# Altium PCB PCB1.PcbDoc
Units mil, origin at the board's own origin, x right, y up, seen from the top; angles counter-clockwise.
Board outline 2355.12 x 1460.12 mil, 2 copper layers (Top Layer, Bottom Layer); 44 components, 36 nets, 217 pads, 180 vias.
Unrouted connection lines stored in the file: 1.
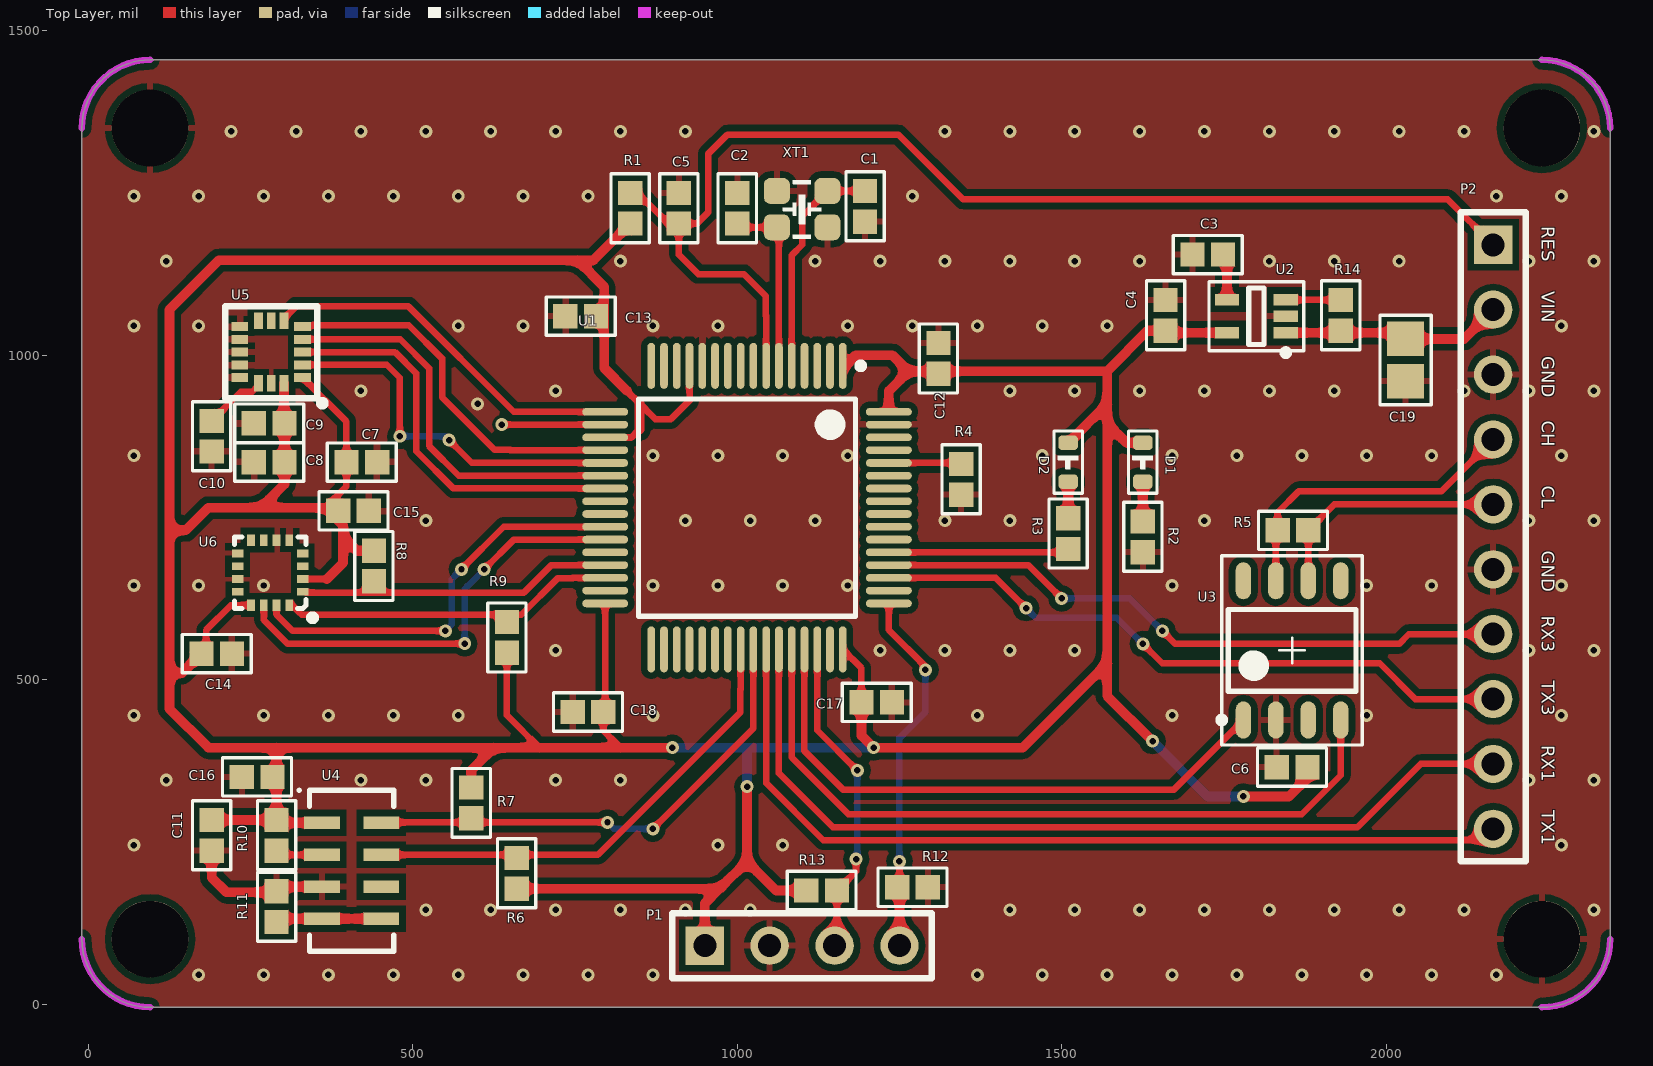
[diagram p0: Top Layer view]
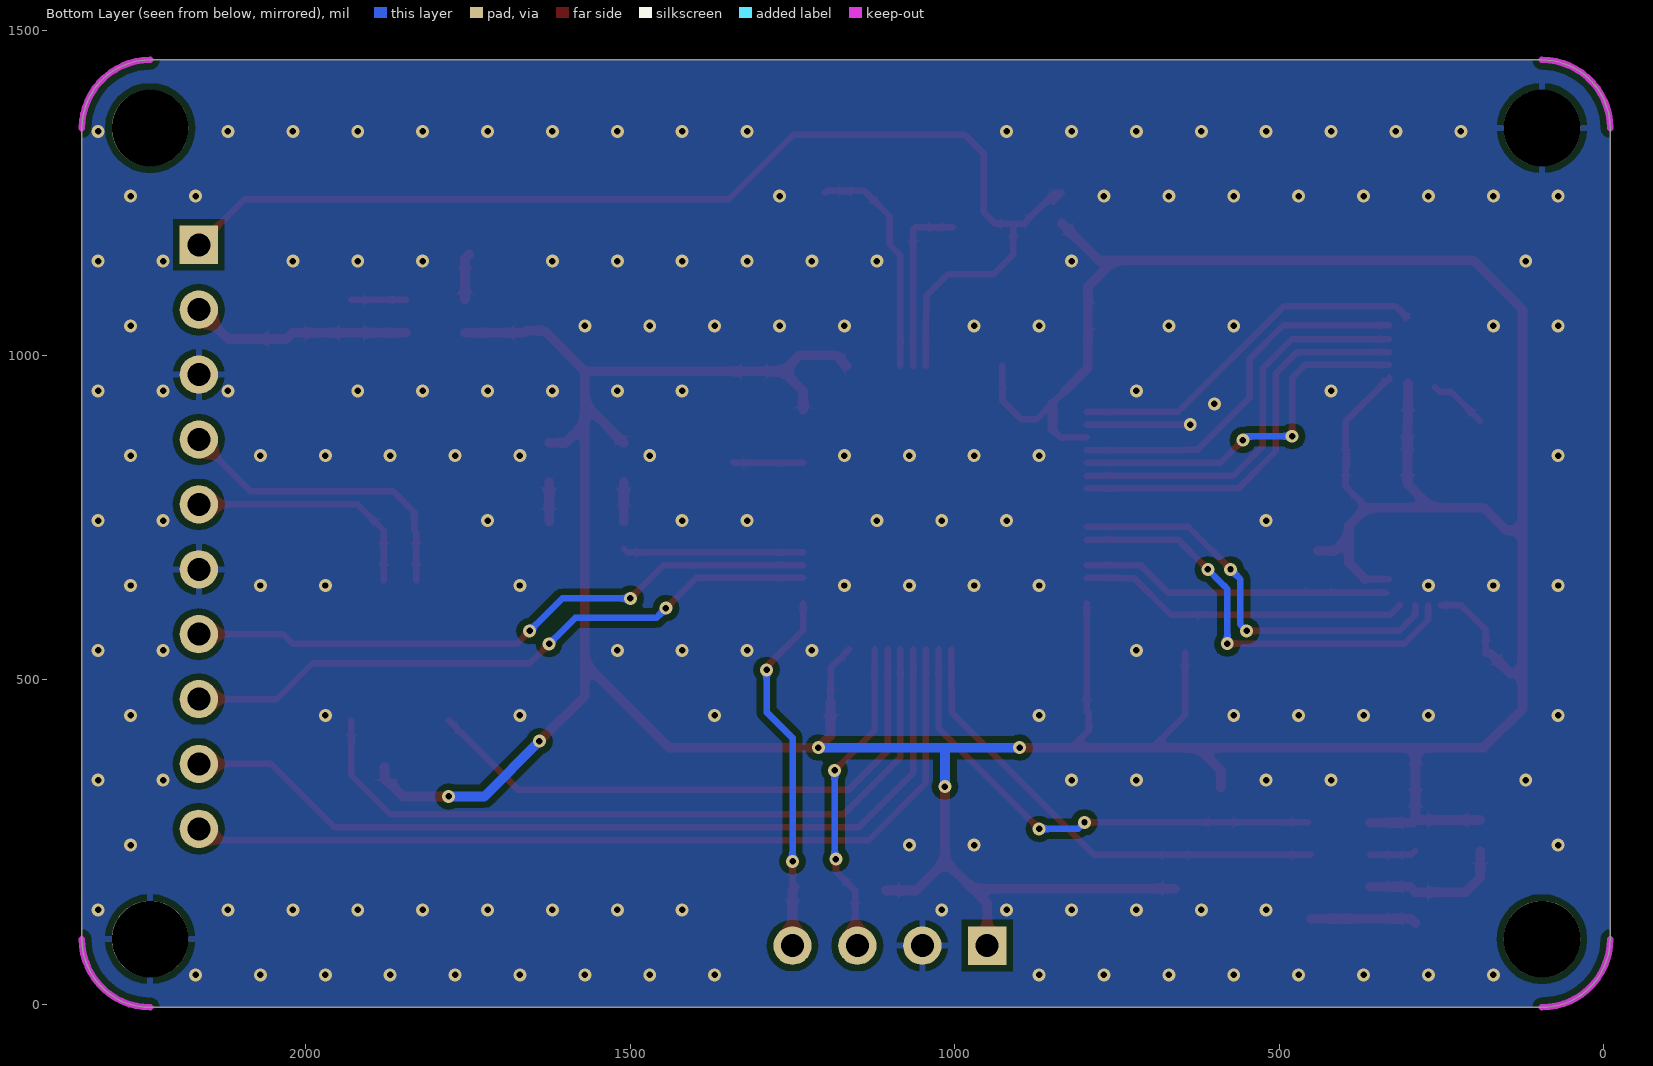
[diagram p1: Bottom Layer view, seen from below]

## Layer stack, top to bottom
Top Solder: solder mask 0.4, Solder Resist, Dk 3.5
Top Layer: signal copper 1.4
Dielectric 1: dielectric 12.6, FR-4, Dk 4.8
Bottom Layer: signal copper 1.4
Bottom Solder: solder mask 0.4, Solder Resist, Dk 3.5

## Board outline
-10,100 ccw(c95,100) 95,-5 2240,-5 2240,-5.12 ccw(c2240,100) 2345.12,100 2345,1350 ccw(c2240,1350) 2240,1455 95,1455 ccw(c95,1350) -10,1350

## Design rules (kind name [scope] priority, off if disabled: settings)
Clearance [All] p1: gap=10 ignorepadtopadclearanceinfootprint=FALSE except(0: Arc-Hole Track-Hole SMDPad-Hole THPad-Hole Via-Hole Fill-Hole Poly-Hole Region-Hole Text-Hole)
PolygonConnect [All] p1: connectstyle=Relief reliefconductorwidth=10 reliefentries=4 polygonreliefangle="90 Angle" airgapwidth=10
RoomDefinition Sheet1 [InComponentClass('Sheet1')] p1: confinementstyle=ConfineIn formatcopy=TRUE lockcomponents=FALSE outline -2730,-2655 -730,-2655 -730,-1655 -2730,-1655
RoutingVias [All] p1: holewidth=10 width=20 viastyle="Through Hole" minholewidth=10 minwidth=20 maxholewidth=20 maxwidth=35
SolderMaskExpansion [All] p1: expansion=4
Width [All] p1: maxlimit=15 minlimit=10 preferedwidth=10 minimp=50.000000 maximp=50.000000 favimp=50.000000
30 further rules are at their usual default settings.

## Components (designator, comment, footprint, x,y, rotation, side; value= is the part's Value field where it differs from the comment)
C1 "Cap_0603" CAP_0603 1197,1229.38 r90 top value=10p
C2 "Cap_0603" CAP_0603 1000,1226.38 r270 top value=10p
C3 "Cap_0603" CAP_0603 1725,1155 r0 top value=0.01u
C4 "Cap_0603" CAP_0603 1660,1061.38 r270 top value=1u
C5 "Cap_0603" CAP_0603 910,1226.38 r270 top value=0.1u
C6 "Cap_0603" CAP_0603 1855,365 r180 top value=100n
C7 "Cap_0603" CAP_0603 421.38,835 r180 top value=10n
C8 "Cap_0603" CAP_0603 278.62,835 r0 top value=0.1u
C9 "Cap_0603" CAP_0603 278.62,895 r0 top value=2.2u
C10 "Cap_0603" CAP_0603 190,875 r90 top value=0.1u
C11 "Cap_0603" CAP_0603 190,260 r90 top value=100n
C12 "Cap_0603" CAP_0603 1310,995 r270 top value=100n
C13 "Cap_0603" CAP_0603 758.62,1060 r0 top value=100n
C14 "Cap_0603" CAP_0603 197.82,540 r180 top value=100n
C15 "Cap_0603" CAP_0603 408.62,760 r180 top value=100n
C16 "Cap_0603" CAP_0603 260,350 r0 top value=100n
C17 "Cap_0603" CAP_0603 1215,465 r180 top value=100n
C18 "Cap_0603" CAP_0603 770,450 r0 top value=100n
C19 "Cap_0805" CAP_0805 2030,992.52 r90 top value=10u
D1 "LED_0603" LED_0603 1625,835 r270 top
D2 "LED_0603" LED_0603 1510,835 r270 top
P1 "Header_1*4" HDR1*4 950,90 r0 top
P2 "Header_1*10" HDR1*10 2165,1170 r270 top
R1 "Res_0603" RES_0603 835,1226.38 r90 top value=10k
R2 "Res_0603" RES_0603 1625,720 r270 top value=10k
R3 "Res_0603" RES_0603 1510,725 r270 top value=10k
R4 "Res_0603" RES_0603 1345,808.62 r270 top value=10k
R5 "Res_0603" RES_0603 1856.38,730 r0 top value=120
R6 "Res_0603" RES_0603 660,201.38 r270 top value=10k
R7 "Res_0603" RES_0603 590,310 r90 top value=10k
R8 "Res_0603" RES_0603 440,675 r90 top value=10k
R9 "Res_0603" RES_0603 645,565 r270 top value=10k
R10 "Res_0603" RES_0603 290,260 r90 top value=10k
R11 "Res_0603" RES_0603 290,150 r90 top value=10k
R12 "Res_0603" RES_0603 1270,180 r180 top value=10k
R13 "Res_0603" RES_0603 1130,175 r0 top value=10k
R14 "Res_0603" RES_0603 1930,1061.38 r90 top value=10k
U1 "STM32F405RGT6" STM-LQFP64_N 1015,765 r270 top
U2 "SGM2019" SGM2019 1800,1060 r180 top
U3 "SN65HVD230D" SN65HVD230 1855,545 r90 top
U4 "MS5611" MS5611 405.67,205.39 r0 top
U5 "ICM20602" ICM20602 281.77,1004.68 r180 top
U6 "IST8310" IST8310 330.35,635.28 r180 top
XT1 "XTAL_2520_4P" XT_2520_4 1100,1225 r0 top value=8MHz

## Footprints (in the part's own frame and the unit in brackets; to place one, negate y for a bottom-side part, rotate by r counter-clockwise, add the part's x,y. Pads: shape width x height; smd on the part's side, far side on the other; paste and mask are expansions set on the pad)
CAP_0603 [mm] "Chip Resistor, 2-Leads, Body 1.60x0.80mm, IPC Medium Density"
  rect 0.95x0.95 smd: 1(-0.6,0) 2(0.6,0)
  silkscreen extent -1.35,-0.75 1.35,0.75, body extent -0.87,-0.48 0.88,0.48, height 0.8
CAP_0805 [mm] "Chip Capacitor, 2-Leads, Body 2.01x1.25mm, IPC Medium Density"
  rect 1.35x1.45 smd: 1(-0.825,0) 2(0.825,0)
  silkscreen extent -1.75,-1 1.75,1, body extent -1.1,-0.72 1.11,0.72, height 0.8
HDR1*4 [mm]
  rect 1.5x1.5 hole 0.9: 1(0,0)
  round 1.5 hole 0.9: 2(2.54,0) 3(5.08,0) 4(7.62,0)
  silkscreen extent -1.27,-1.27 8.89,1.27
HDR1*10 [mm]
  rect 1.5x1.5 hole 0.9: 1(0,0)
  round 1.5 hole 0.9: 2(2.54,0) 3(5.08,0) 4(7.62,0) 5(10.16,0) 6(12.7,0) 7(15.24,0) 8(17.78,0) 9(20.32,0) 10(22.86,0)
  silkscreen extent -1.27,-1.27 24.13,1.27
ICM20602 [mm]
  rect 0.65x0.35 smd: 1(-1.225,1) 2(-1.225,0.5) 3(-1.225,0) 4(-1.225,-0.5) 5(-1.225,-1) 9(1.225,-1) 10(1.225,-0.5) 11(1.225,0) 12(1.225,0.5) 13(1.225,1)
  rect 0.35x0.65 smd: 6(-0.5,-1.225) 7(0,-1.225) 8(0.5,-1.225) 14(0.5,1.225) 15(0,1.225) 16(-0.5,1.225)
  rect 0x0 smd: 17(0,0) 18(0,0) 19(0,0) 20(0,0) 21(0,0) 22(0,0) 23(0,0) 24(0,0)
  silkscreen extent -2.12,-1.8 1.8,2.12, body extent -1.55,-1.55 1.55,1.55, height 0.75
IST8310 [mm]
  rect 0.45x0.3 smd: 1(0,0) 2(0,-0.5) 3(0,-1) 4(0,-1.5) 9(2.55,-1.5) 10(2.55,-1) 11(2.55,-0.5) 12(2.55,0)
  rect 0.3x0.45 smd: 5(0.525,-2.025) 6(1.025,-2.025) 7(1.525,-2.025) 8(2.025,-2.025) 13(2.025,0.525) 14(1.525,0.525) 15(1.025,0.525) 16(0.525,0.525)
  silkscreen extent -0.51,-2.15 2.67,1.14
LED_0603 [mil]
  rrect50% 22x30 smd: 1(-30,0) 2(30,0)
  silkscreen extent -48,-22 48,22, body extent -32,-16 32,16, height 24
MS5611 [mm] "SON, 8-Leads, Body 6.00x3.00mm, Pitch 1.25mm, IPC Medium Density"
  rect 1.4x0.5 smd: 1(-1.16,1.875) 2(-1.16,0.625) 3(-1.16,-0.625) 4(-1.16,-1.875) 5(1.16,-1.875) 6(1.16,-0.625) 7(1.16,0.625) 8(1.16,1.875)
  silkscreen extent -2.1,-3.15 1.65,3.2, body extent -1.5,-3 1.5,3, height 1
RES_0603 [mm] "Chip Resistor, 2-Leads, Body 1.60x0.80mm, IPC Medium Density"
  rect 0.95x0.95 smd: 1(-0.6,0) 2(0.6,0)
  silkscreen extent -1.35,-0.75 1.35,0.75, body extent -0.87,-0.48 0.88,0.48, height 0.8
SGM2019 [mm] "SOT23, 5-Leads, Body 2.10x2.30mm, Pitch 0.65mm, IPC Medium Density"
  rect 0.95x0.45 smd: 1(-1.15,0.65) 2(-1.15,0) 3(-1.15,-0.65) 4(1.15,-0.65) 5(1.15,0.65)
  silkscreen extent -1.85,-1.35 1.85,1.55, body extent -0.67,-1.1 0.67,1.1, height 1.1
SN65HVD230 [mm] "SOP, 8-Leads, Body 4.90x3.90mm, Pitch 1.27mm, IPC Medium Density"
  oval 1.45x0.6 smd: 1(-2.725,1.905) 2(-2.725,0.635) 3(-2.725,-0.635) 4(-2.725,-1.905) 5(2.725,-1.905) 6(2.725,-0.635) 7(2.725,0.635) 8(2.725,1.905)
  silkscreen extent -3.7,-2.75 3.7,2.88, body extent -2,-2.5 2,2.5, height 1.75
STM-LQFP64_N [mm] "Thin QFP, 64-Leads, Body 10x10mm, Pitch 0.5mm, IPC Medium Density"
  oval 1.8x0.3 smd: 1(-5.55,3.75) 2(-5.55,3.25) 3(-5.55,2.75) 4(-5.55,2.25) 5(-5.55,1.75) 6(-5.55,1.25) 7(-5.55,0.75) 8(-5.55,0.25) 9(-5.55,-0.25) 10(-5.55,-0.75) 11(-5.55,-1.25) 12(-5.55,-1.75) 13(-5.55,-2.25) 14(-5.55,-2.75) 15(-5.55,-3.25) 16(-5.55,-3.75) 33(5.55,-3.75) 34(5.55,-3.25) 35(5.55,-2.75) 36(5.55,-2.25) 37(5.55,-1.75) 38(5.55,-1.25) 39(5.55,-0.75) 40(5.55,-0.25) 41(5.55,0.25) 42(5.55,0.75) 43(5.55,1.25) 44(5.55,1.75) 45(5.55,2.25) 46(5.55,2.75) 47(5.55,3.25) 48(5.55,3.75)
  oval 0.3x1.8 smd: 17(-3.75,-5.55) 18(-3.25,-5.55) 19(-2.75,-5.55) 20(-2.25,-5.55) 21(-1.75,-5.55) 22(-1.25,-5.55) 23(-0.75,-5.55) 24(-0.25,-5.55) 25(0.25,-5.55) 26(0.75,-5.55) 27(1.25,-5.55) 28(1.75,-5.55) 29(2.25,-5.55) 30(2.75,-5.55) 31(3.25,-5.55) 32(3.75,-5.55) 49(3.75,5.55) 50(3.25,5.55) 51(2.75,5.55) 52(2.25,5.55) 53(1.75,5.55) 54(1.25,5.55) 55(0.75,5.55) 56(0.25,5.55) 57(-0.25,5.55) 58(-0.75,5.55) 59(-1.25,5.55) 60(-1.75,5.55) 61(-2.25,5.55) 62(-2.75,5.55) 63(-3.25,5.55) 64(-3.75,5.55)
  silkscreen extent -5.67,-4.25 4.25,4.58, body extent -5,-5 5,5, height 1.6
XT_2520_4 [mil]
  rrect50% 40x40 smd: 1(39,28) 2(-39,28) 3(-39,-28) 4(39,-28)
  silkscreen extent -30,-44 30,44, body extent -49,-39 49,39, height 31

## Part data
C1 C2 C3 C4 C5 C6 C7 C8 C9 C10 C11 C12 C13 C14 C15 C16 C17 C18 C19: "Capacitor"
D1 D2: "LED"
R1 R2 R3 R4 R5 R6 R7 R8 R9 R10 R11 R12 R13 R14: "Resistor"
U1: "ARM Cortex-M4 32-bit MCU+FPU, 210 DMIPS, 1024 kB Flash, 192 kB Internal RAM, 51 I/Os, 64-pin LQFP, -40 to 85 degC, Tray", I/Os (High Current)=51, Manufacturer=STMicroelectronics, Operating Frequency(F) (Processor speed) (MHz)=168, Supplier Part Number 1=497-11767-ND, Supply Voltage(Vcc) max (V)=3.6, Supply Voltage(Vcc) min (V)=1.8, ComponentLink1Description="Manufacturer URL", ComponentLink1URL=http://www.st.com/web/en/home.html, ComponentLink2Description=Datasheet, ComponentLink2URL=http://www.st.com/st-web-ui/static/active/en/resource/technical/document/datasheet/DM00037051.pdf, ComponentLink3Description="Package Specification", ComponentLink3URL=http://www.st.com/st-web-ui/static/active/en/resource/technical/document/datasheet/DM00037051.pdf, Core="ARM Cortex-M4", D/A Converter=2x12-bit, DatasheetVersion="Rev. 4", FLASH Size (Prog) (kB)=1024, Internal RAM Size (kB)=192, Mounting Technology="Surface Mount", PackageDescription="64-Pin Low Profile Quad Flat Package, 10 x 10 mm Body, 0.5 mm Pitch", PackageReference=LQFP64, PackageVersion="Rev. 4, 06/2013", Packing=Tray, PartNumber=STM32F405RGT6, Supplier 1=Digi-Key, Supplier 2=Farnell, Supplier 3=Newark, Supplier 4=Mouser, Supplier Part Number 2=2064363, Supplier Part Number 3=73T2329, Supplier Part Number 4=511-STM32F405RGT6
XT1: "Crystal Oscillator"

## Free pads (board coordinates)
  round 118.11 hole 118.11: 2(95,1350) 3(95,100) 4(2240,100) 5(2240,1350)

## Via types
v1: diameter 20, hole 10, Top Layer to Bottom Layer, 180 vias

## Nets (pads, with @x,y where several pads share a name; then routed paths per layer and width w, separated by ;. In a path a pad name is that pad's centre, name@x,y a point inside that pad or via, vN(x,y) a via of type N, cw(c..) or ccw(c..) an arc to the next point about the centre after c; other vN are vias at no path point)
3V3: C4.2 C6.1 C7.2 C8.2 C9.2 C11.2 C12.2 C13.2 C14.2 C15.2 C16.2 C17.2 C18.2 D1.1 D2.1 P1.1 R1.1 R6.2 R7.2 R8.2 R9.2 R10.2 R13.1 U1.1 U1.13 U1.19 U1.32 U1.48 U1.64 U2.5 U3.3 U4.1 U5.1 U5.16 U6.2 U6.13 | length 7988.3
  Top Layer w10: C14.2@181.38,540 181.38,576.38 219.61,614.61 U6.13 ; U5.1 397.76,897.56 C7.2 397.76,797.76 365,765 ; U6.2 367.46,654.96 ; C7.2@395,830 C7.2@395,847.58 ; R9.2 645,445 695,395 ; C18.2 793.62,421.38 820,395 ; C18.2@796.5,450 U1.32 ; U1.19 837.13,873.27 849.43,885.57 ; 830,945 849.43,925.57 873.58,901.42 897.83,901.42 926.42,930 U1.13 ; U1.48 1191.38,517.76 C17.2
  Top Layer w15: C14.2 144.2,510 125,510 ; C11.2 R10.2 ; U5.16 301.46,895.79 C9.2 C8.2 302.24,801.12 266.12,765 ; U4.1 294.41,279.21 R10.2 ; 367.46,654.96 392.5,680 392.5,720 ; R8.2 413.88,698.62 392.5,720 ; R7.2 590,360 625,395 ; R6.2 972.76,177.76 ; 830,945 795,980 795,1104.91 753.53,1146.38 ; R1.1 778.62,1146.38 753.53,1146.38 ; 849.43,885.57 849.43,925.57 ; v1(900,395) 820,395 695,395 625,395 ; P1.1 950,155 972.76,177.76 ; v1(1015,335) 1015,220 ; R13.1 1060,175 1015,220 ; U1.1@1166.36,983.5 1182.85,1000 1238.82,1000 1263.82,975 ; C17.2 1191.38,413.62 v1(1210,395) 1440,395 1570,525 ; U1.64@1233.5,916.36 1233.5,944.69 1263.82,975 ; D2.1 1510.59,865 1570,924.41 ; D1.1 1599.7,865 1570,894.7 ; v1(1640,405) 1570,475 1570,525 ; U2.5 1663.35,1034.41 C4.2 1632.5,1037.76 1569.74,975 ; v1(1780,320) 1850,320 1878.62,348.62 C6.1 ; 125,510 125,730 ; 125,510 125,455 185,395 290,395 ; 125,730 150,730 185,765 266.12,765 ; 125,730 125,1070 201.38,1146.38 753.53,1146.38 ; 266.12,765 365,765 392.5,737.5 392.5,720 ; R10.2 290,395 ; 290,395 625,395 ; 972.76,177.76 1015,220 ; 1263.82,975 1569.74,975 ; 1569.74,975 1570,974.74 1570,924.41 ; 1570,525 1570,894.7 ; 1570,894.7 1570,924.41
  Bottom Layer w15: v1(900,395) 1020,395 ; v1(1015,335) 1015,390 1020,395 ; v1(1210,395) 1020,395 ; v1(1640,405) 1725,320 v1(1780,320)
BOOT0: R4.1 U1.60 | length 108.3
  Top Layer w10: U1.60 1340.28,833.9 R4.1@1341.38,835
CAN1_RX: U1.44 U3.4 | length 1158.9
  Top Layer w10: U1.44 1083.9,380 1171.4,292.5 1870,292.5 1930,352.5 U3.4
CAN1_TX: U1.45 U3.1 | length 902.4
  Top Layer w10: U1.45 1103.58,390 1163.58,330 1672.28,330 U3.1
CANH: P2.4 R5.1 U3.7 | length 485.4
  Top Layer w10: U3.7 1830,727.24 R5.1 1832.76,757.76 1865,790 2085,790 P2.4
CANL: P2.5 R5.2 U3.6 | length 379.3
  Top Layer w10: U3.6 R5.2 1920,770 P2.5
GND: C1.1 C2.1 C3.1 C4.1 C5.1 C6.2 C7.1 C8.1 C9.1 C10.1 C11.1 C12.1 C13.1 C14.1 C15.1 C16.1 C17.1 C18.1 C19.1 P1.2 P2.3 P2.6 pad.2 pad.4 R2.2 R4.2 R11.2 R12.1 U1.12 U1.18 U1.63 U2.2 U3.2 U4.3 U5.9 U5.10 U5.11 U5.12 U5.13 U5.15 U6.5 U6.6 U6.9 U6.11 XT1.2 XT1.4 | length 383.8
  Top Layer w10: v1(637.05,892.95) U1.18
  Top Layer w15: C11.1 190,195 212.76,172.24 290,172.24 298.54,180.79 U4.3
  other v1: 170,45 270,45 370,45 470,45 570,45 670,45 770,45 870,45 1370,45 1470,45 1570,45 1670,45 1770,45 1870,45 1970,45 2070,45 2170,45 520,145 620,145 720,145 820,145 920,145 1020,145 1420,145 1520,145 1620,145 1720,145 1820,145 1920,145 2020,145 2120,145 2320,145 70,245 970,245 1070,245 2270,245 120,345 420,345 520,345 720,345 820,345 2220,345 2320,345 70,445 270,445 370,445 470,445 570,445 870,445 1370,445 1670,445 1970,445 2270,445 720,545 1220,545 1320,545 1420,545 1520,545 2220,545 2320,545 70,645 170,645 270,645 870,645 970,645 1070,645 1170,645 1670,645 1970,645 2070,645 2270,645 520,745 920,745 1020,745 1120,745 1320,745 1420,745 1720,745 2220,745 2320,745 70,845 870,845 970,845 1070,845 1170,845 1470,845 1670,845 1770,845 1870,845 1970,845 2070,845 2270,845 600,925 420,945 720,945 1420,945 1520,945 1620,945 1720,945 1820,945 1920,945 2120,945 2220,945 2320,945 70,1045 170,1045 570,1045 670,1045 870,1045 970,1045 1170,1045 1270,1045 1370,1045 1470,1045 1570,1045 2270,1045 120,1145 820,1145 1120,1145 1220,1145 1320,1145 1420,1145 1520,1145 1620,1145 1820,1145 1920,1145 2020,1145 2220,1145 2320,1145 70,1245 170,1245 270,1245 370,1245 470,1245 570,1245 670,1245 770,1245 1270,1245 2170,1245 2270,1245 220,1345 320,1345 420,1345 520,1345 620,1345 720,1345 820,1345 920,1345 1320,1345 1420,1345 1520,1345 1620,1345 1720,1345 1820,1345 1920,1345 2020,1345 2120,1345 2320,1345
I2CI_SCL: R8.1 U1.29 U6.1 | length 479
  Top Layer w10: U6.1@335,634.09 671.26,634.09 713.58,676.42 U1.29
I2CI_SDA: R9.1 U1.30 U6.16 | length 511.7
  Top Layer w10: U6.16@314.33,614.65 328.98,600 667.17,600 723.58,656.42 746.42,656.42 746.73,656.73 U1.30
I2CM_SCL: R7.1 U1.41 U4.8 | length 759.8
  Top Layer w10: U4.8@455,280 v1(800,280) ; v1(870,270) 1024.84,424.84 U1.41
  Bottom Layer w10: v1(800,280) 810,270 v1(870,270)
I2CM_SDA: R6.1 U1.40 U4.7 | length 741.4
  Top Layer w10: U4.7 785.36,230 1004.84,449.49 1004.84,485 ; 1005.16,485 U1.40
icm20602_cs: U1.20 U5.5 | length 581.3
  Top Layer w10: U5.5@330,1046.26 493.74,1046.26 545,995 545,935 626.1,853.9 650,853.9 ; 650,853.58 U1.20
icm20602_irq: U1.17 U5.6 | length 566.9
  Top Layer w10: U5.6@303.66,1058.61 320.05,1075 493.28,1075 655.65,912.64 U1.17
icm20602_miso: U1.22 U5.4 | length 623.8
  Top Layer w10: U5.4 480.63,1024.37 525,980 525,860 570.79,814.21 U1.22
icm20602_mosi: U1.23 U5.3 | length 623.8
  Top Layer w10: U5.3 472.48,1004.68 505.31,971.85 505.31,851.85 562.63,794.53 U1.23
icm20602_sck: U1.21 U5.2 | length 590.6
  Top Layer w10: U5.2 460,985 480,965 v1(480,875) ; v1(556.1,868.9) 590.79,834.21 605,834.21 ; 596.1,833.9 U1.21
  Bottom Layer w10: v1(480,875) 550,875 v1(556.1,868.9)
IST8310_INT: U1.26 U6.15 | length 639.1
  Top Layer w10: U6.15 290,600 315,575 v1(550,575) ; v1(575,670) 575,670.36 640.12,735.47 U1.26
  Bottom Layer w10: v1(550,575) 560,585 560,655 v1(575,670)
IST8310_RST: U1.27 U6.14 | length 680.4
  Top Layer w10: U6.14 270.32,591.85 306.85,555.32 v1(580,555.32) ; v1(610,670) 655.79,715.79 U1.27
  Bottom Layer w10: v1(580,555.32) 580,640 585,645 585.36,645 600,659.64 600,660 v1(610,670)
LED: R3.2 U1.53 | length 278.7
  Top Layer w10: U1.53 1504.72,696.1 R3.2
NetC3_2: C3.2 U2.4 | length 71.9
  Top Layer w15: C3.2 1754.72,1148.9 U2.4
NetC10_2: C10.2 U5.14 | length 91.5
  Top Layer w10: C10.2 234.8,943.43 252.55,943.43 U5.14@259.88,950.76
NetD1_2: D1.2 R2.1 | length 61.4
  Top Layer w15: R2.1 D1.2
NetD2_2: D2.2 R3.1 | length 61.4
  Top Layer w15: R3.1@1510,743.62 R3.1 D2.2
NetR10_1: R10.1 U4.2 | length 72.6
  Top Layer w10: R10.1 296.38,230 U4.2
NetR11_1: R11.1 U4.4 U4.5 | length 164.1
  Top Layer w15: R11.1@290,125 296.57,131.57 U4.4 U4.5
NetR14_2: R14.2 U2.3 | length 85
  Top Layer w10: U2.3 1845.87,1085 R14.2
NRST: C5.2 P2.1 R1.2 U1.7 | length 1865
  Top Layer w10: R1.2@848.54,1236.46 R1.2 846.37,1250 893.61,1202.76 C5.2 ; 1044.21,1060.47 1044.21,1060.79 ; U1.7 1044.53,1060.47 1044.21,1060.79 ; P2.1 2095,1240 1348.28,1240 1248.28,1340 985,1340 955,1310 955,1220 937.76,1202.76 C5.2 ; C5.2 910,1155 940,1125 1010,1125 1044.21,1090.79 1044.21,1060.79
SWCLK: P1.4 R12.2 U1.49 | length 570
  Top Layer w10: U1.49@1233.5,616.14 1233.5,576.5 1290,520 v1(1290,515) ; U1.49 U1.49@1234.11,616.75 ; R12.2 1250,183.62 v1(1250,220)
  Top Layer w15: R12.2 1250,176.38 P1.4
  Bottom Layer w10: v1(1250,220) 1250,410 1290,450 v1(1290,515)
SWDIO: P1.3 R13.2 U1.46 | length 496.6
  Top Layer w10: U1.46 1123.27,421.73 v1(1185,360) ; P1.3 1153.62,93.62 R13.2 1183.15,204.53 v1(1183.15,223.15)
  Bottom Layer w10: v1(1183.15,223.15) 1185,225 v1(1185,360)
USART1_RX: P2.9 U1.43 | length 1366.4
  Top Layer w10: U1.43 1064.21,355.79 1147.5,272.5 1955.78,272.5 2053.28,370 P2.9
USART1_TX: P2.10 U1.42 | length 1370.2
  Top Layer w10: U1.42 1044.53,340.47 1132.5,252.5 2147.5,252.5 P2.10
USART3_RX: P2.7 U1.52 | length 988
  Top Layer w10: U1.52 1448.58,676.42 v1(1500,625) ; v1(1655,575) 1675,555 2020,555 2035,570 P2.7
  Bottom Layer w10: v1(1500,625) 1605,625 v1(1655,575)
USART3_TX: P2.8 U1.51 | length 1008.8
  Top Layer w10: U1.51 1398.27,656.73 v1(1445,610) ; v1(1625,555) 1655,525 1990,525 2045,470 P2.8
  Bottom Layer w10: v1(1445,610) 1460,595 1585,595 v1(1625,555)
VIN: C19.2 P2.2 R14.1 U2.1 | length 342.3
  Top Layer w15: U2.1 2020.59,1034.41 C19.2 2120,1025 P2.2
XT-I: C1.2 U1.5 XT1.1 | length 443.3
  Top Layer w10: U1.5 1083.9,1138.9 ; 1084.21,1050 1084.21,1154.21 1100,1170 1100,1214 XT1.1 C1.2 C1.2@1200,1250
XT-O: C2.2 U1.6 XT1.3 | length 272.4
  Top Layer w10: C2.2@1003.38,1197 XT1.3 1064.21,1193.79 U1.6
pads on no net: U1.2 U1.3 U1.4 U1.8 U1.9 U1.10 U1.11 U1.14 U1.15 U1.16 U1.24 U1.25 U1.28 U1.31 U1.33 U1.34 U1.35 U1.36 U1.37 U1.38 U1.39 U1.47 U1.50 U1.54 U1.55 U1.56 U1.57 U1.58 U1.59 U1.61 U1.62 U3.5 U3.8 U4.6 U5.7 U5.8 U5.17 U5.18 U5.19 U5.20 U5.21 U5.22 U5.23 U5.24 U6.3 U6.4 U6.7 U6.8 U6.10 U6.12

## Polygon pours and split planes (outlines as drawn)
GND on Top Layer "GND_L01_P021" (solid, pour order 21): -10,100 -10,1350 cw(c95,1350) 95,1455 2240,1455 cw(c2240,1350) 2345,1350 2345.12,100 cw(c2240,100) 2240,-5.12 2240,-5 95,-5 cw(c95,100)
GND on Bottom Layer "GND_L02_P022" (solid, pour order 22): -10,100 -10,1350 cw(c95,1350) 95,1455 2240,1455 cw(c2240,1350) 2345,1350 2345.12,100 cw(c2240,100) 2240,-5.12 2240,-5 95,-5 cw(c95,100)

## Keep-outs
Keep-Out Layer:
  lines w10: -10,100 ccw(c95,100) 95,-5 ; -10,1350 cw(c95,1350) 95,1455 ; 2240,-5.12 ccw(c2240,100) 2345.12,100 ; 2240,1455 cw(c2240,1350) 2345,1350

## Silkscreen, mask and mechanical layers (free items; w line width, h text height)
Mechanical 1:
  lines w10: -10,100 -10,1350 ; 95,-5 2240,-5 ; 95,1455 2240,1455 ; 2238.21,-76.79 95,-76.79 cw(c95,100) -81.79,100 -81.79,1350 cw(c95,1350) 96.78,1526.78 2240,1526.78 cw(c2240,1350) 2416.78,1350 2416.9,100 ; 2240,-76.78 ccw(c2240,100) 2416.78,100 ; 2345,1350 2345.12,100

## Text inside footprints (layer, text, board x,y; h text height)
P2: Top Overlay "TX1" at 2240,298.53 h20 r270; Top Overlay "RX1" at 2240,398.53 h20 r270; Top Overlay "TX3" at 2240,498.53 h20 r270; Top Overlay "RX3" at 2240,598.53 h20 r270; Top Overlay "GND" at 2240,698.53 h20 r270; Top Overlay "CL" at 2240,798.53 h20 r270; Top Overlay "CH" at 2240,898.53 h20 r270; Top Overlay "GND" at 2240,998.53 h20 r270; Top Overlay "VIN" at 2240,1098.53 h20 r270; Top Overlay "RES" at 2240,1198.53 h20 r270